# Altium PCB TestWoodStoveLayout1.PcbDoc (part 5 of 5)
Units mil, origin at the board's own origin, x right, y up, seen from the top; angles counter-clockwise.
Board outline 4000 x 3000 mil, 4 copper layers (Top Layer, LGND, LPWR, Bottom Layer), stack 64.6 mil thick; 138 components, 91 nets, 563 pads, 652 vias.
Unrouted connection lines stored in the file: 127.
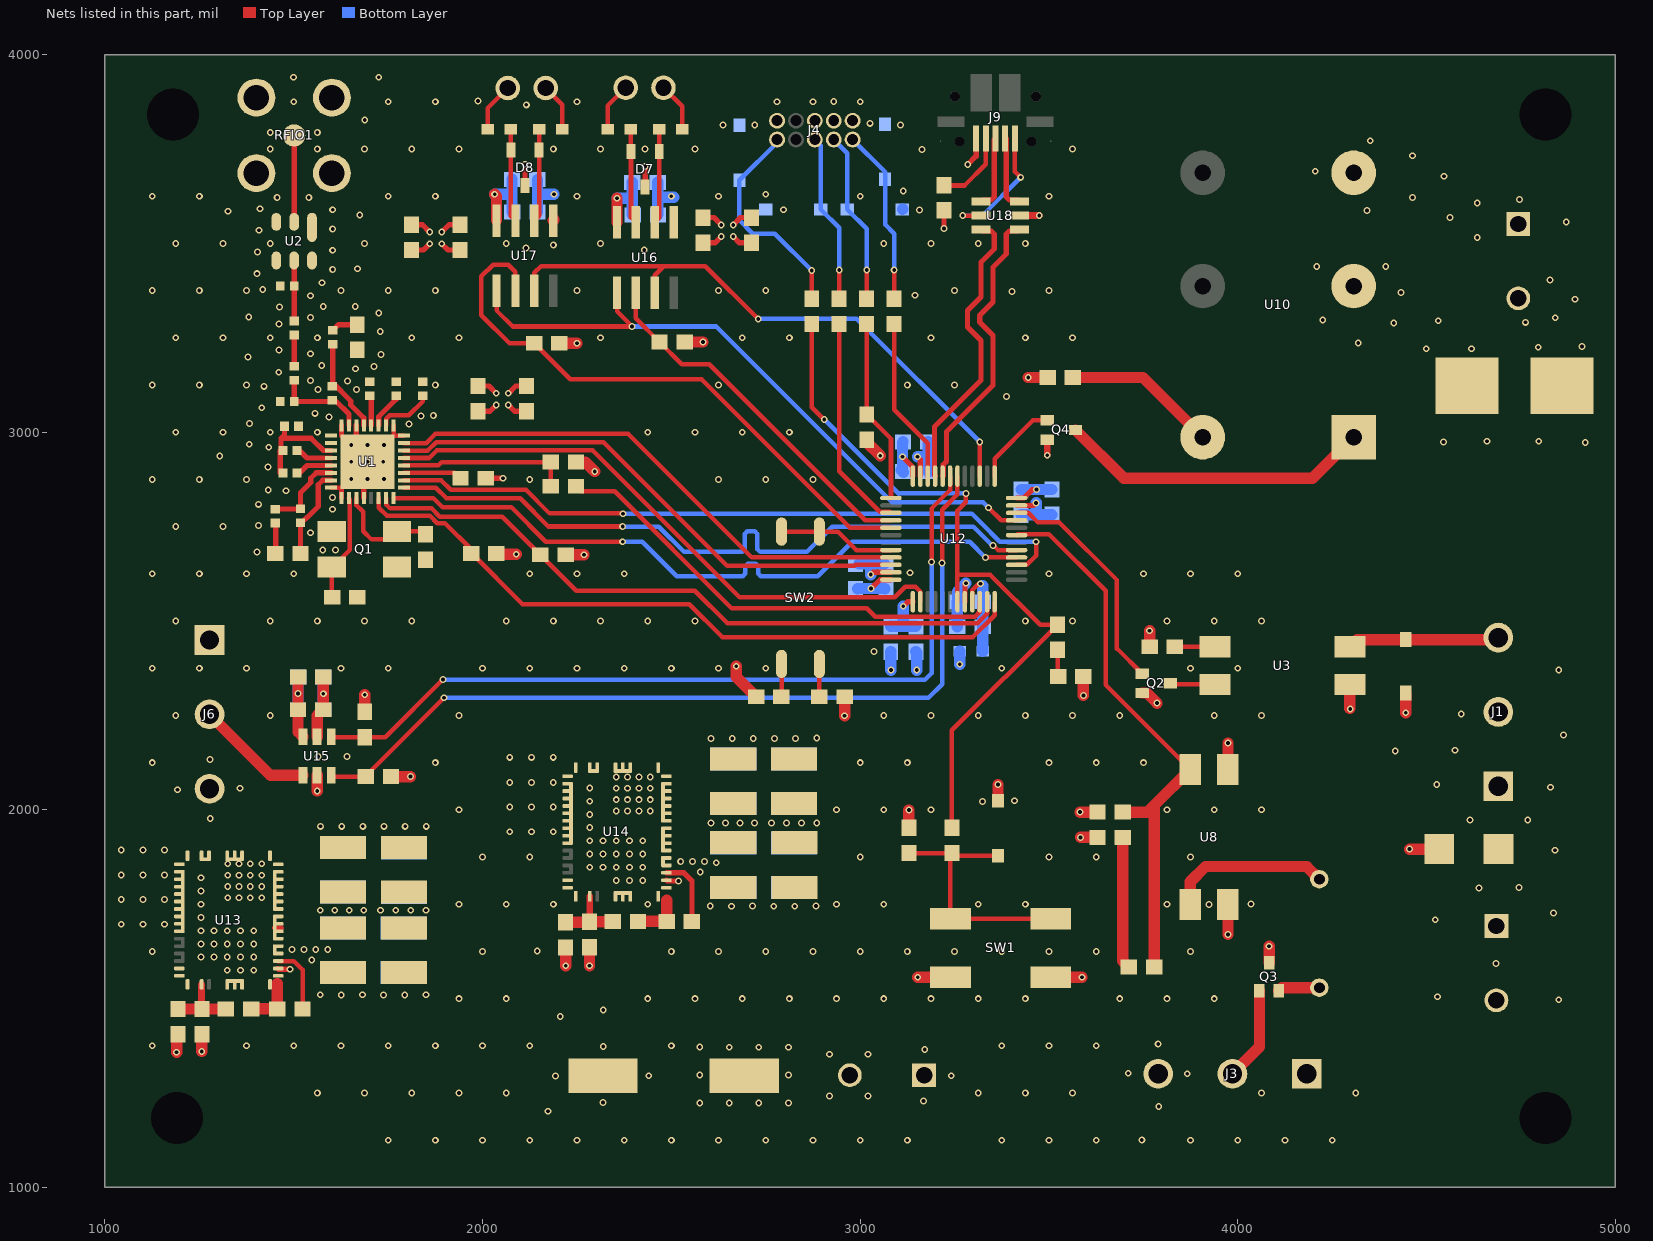
[diagram p4: the nets of this part, all layers, seen from the top]

## Polygon pours and split planes (outlines as drawn) (continued)
+3V3 on Top Layer "Top Layer-+3V3 1" (solid, pour order 203): 2327.09,1968.13 2327.09,2126.04 2325.52,2127.61 2457.33,2259.42 2911,2259.42 2910,2258.42 2910,2083 2591,2083 2590,2084 2499.95,1993.95 2499.95,1968.15
+5V on Top Layer "Top Layer-+5V" (solid, pour order 221): 2506.09,1968
GND on Top Layer "Top Layer-+5V 2" (solid, pour order 217): 2208.4,1825.31 2208.4,1729.34 2274.25,1729.12 2274.25,1787.84 2331.03,1787.84 2331.03,1732.7 2331.41,1732.31 2332.01,1732.9 2460.31,1732.9 2460.31,1885.72 2535.63,1885.72 2602,1941.57 2612.96,1941.57 2923,1941.57 2923,1988.71 2531.8,1988.92 2505.07,1962.19 2326.17,1962.19 2323.31,1965.05 2323.31,2091.44 2265.54,2091.44 2250.93,2076.83 2250.93,1825.31
GND on Top Layer "Top Layer-+5V 2" (solid, pour order 213): 1175.78,1590 1175.78,1499.34 1241.63,1499.12 1241.63,1557.82 1242.14,1558.33 1298.41,1558.33 1298.41,1497.39 1298.8,1497 1299.39,1497.59 1429.68,1497.59 1429.68,1650.41 1503.02,1650.41 1569.6,1717 1570.6,1716 1869,1716 1869,1753.41 1499.18,1753.61 1472.45,1726.88 1293.55,1726.88 1290.7,1729.74 1290.7,1856.13 1232.93,1856.13 1218.31,1841.52 1218.31,1590
+5V on Top Layer "Top Layer-+5V 1" (solid, pour order 193): 1299.54,1734.02 1299.54,1890.5 1299.46,1890.58 1432.88,2024 1894.92,2024 1895.08,2023.83 1894.74,2023.5 1894.74,1835.66 1542.05,1835.66 1542,1835.61 1542,1804.78 1471.21,1733.99
+3V3 on Top Layer "Top Layer-+3V3" (solid, pour order 67): 1897,3103 1897,3005 1740,3005 1740,3042 1755,3057 1798,3057 1798,3103
+12V on Top Layer "Top Layer-+12V" (solid, pour order 103): 2487.4,1879.05 2911,1879.05 2911,1862.04 2911,1707.05 2486.41,1707.05
+12V on Top Layer "Top Layer-+12V" (solid, pour order 59): 1452.49,1645 1898,1645 1896.5,1643.5 1896.5,1473 1451.5,1473
+12V on Top Layer "Top Layer-+12V 1" (solid, pour order 123): 2545,1412 3057,1412 3057,1190 2545,1190

## Other copper
Top Layer:
  region net ACFUSE: 4151.43,3500 4450,3500 4450,3439.59 4700,3189.59 4700,2900 4500,2900 4500,3150 4450,3200 4150.71,3200
  region net "AC In": 4700,3428.37 4700,3250 4750,3250 4750,2900 4950,2900 4950,3428.37
  region net "AC Out": 4150,3798.59 4150,3550 4151.43,3551.43 4500,3551.43 4500,3482.81 4950,3482.81 4950,3649.12 4607.41,3649.12 4607.41,3800
  region net ACFUSE: 4151.43,3477.5
LGND:
  pour cut-out: 925,3668
  pour cut-out: 1000,4000 1310,4000 1311,3999 1311,3700 1002,3700 1001,3699
  pour cut-out: 1000,1301 1001,1300 1425,1300 1425,1001.59 1422.41,999 1421.41,1000 1000,1000
LPWR:
  pour cut-out: 1025,2560.2 1025.78,2559.42 1923.42,2559.42 1926,2562 1926,2821.37 1753.37,2994 1704,2994 1704,3144.3 1777,3144.3 1777,3969 1025,3969
  pour cut-out: 1310,4000 1310,3700 1309.59,3699.59 1000,3699.59 1000,4000
Bottom Layer:
  region net ACFUSE: 4151.43,3500 4450,3500 4450,3439.59 4700,3189.59 4700,2900 4500,2900 4500,3150 4450,3200 4150.71,3200
  region net "AC In": 4700,3428.37 4700,3250 4750,3250 4750,2900 4950,2900 4950,3428.37
  region net "AC Out": 4150,3798.59 4150,3550 4151.43,3551.43 4500,3551.43 4500,3482.81 4950,3482.81 4950,3649.12 4607.41,3649.12 4607.41,3800

## Silkscreen, mask and mechanical layers (free items; w line width, h text height)
Top Overlay:
  lines w30: 3644,3980 3644,2731 3645,2730 5000,2730
  text "-R" at 2220,3952 h30
  text "+Y" at 2279,3952 h30
  text "-R" at 2537,3950 h30
  text "+Y" at 1937,3949 h30
  text "HIGH VOLTAGE" at 4005,3906 h60
  text "AC OUT" at 4753,3705 h30
  text "AC IN" at 4958,3284 h30 r90
  text "FAN POWER" at 4647,2583 h30
  text "PBLU" at 4931,2419 h30 r90
  text "+5VRED" at 1072,2390 h30 r90
  text "YLW" at 1075,2210.44 h30 r90
  text "-BLK" at 4931,2201.5 h30 r90
  text "GNDBLK" at 1077,1990.63 h30 r90
  text "+RED" at 4931,1984 h30 r90
  text "+12FAN" at 4931,1646 h30 r90
  text "GNDFAN" at 4931,1400 h30 r90
  text "DOOR SENSOR" at 4366,1143 h30 r90
  text "-Blu" at 3716,1081 h30
  text "Blk" at 3952,1081 h30
  text "+Brn" at 4141,1081 h30
  text "+12V" at 2921,1058 h30
  text "GND" at 3135,1058 h30
Mechanical 2:
  the board outline again, w5

## Text inside footprints (layer, text, board x,y; h text height)
J4: Top Overlay "2" at 3039,3657 h73.82 r180; Top Overlay "1" at 3011,3953 h73.82 r270